# EAGLE board Control-print (EAGLE 5.12), part 1 of 2
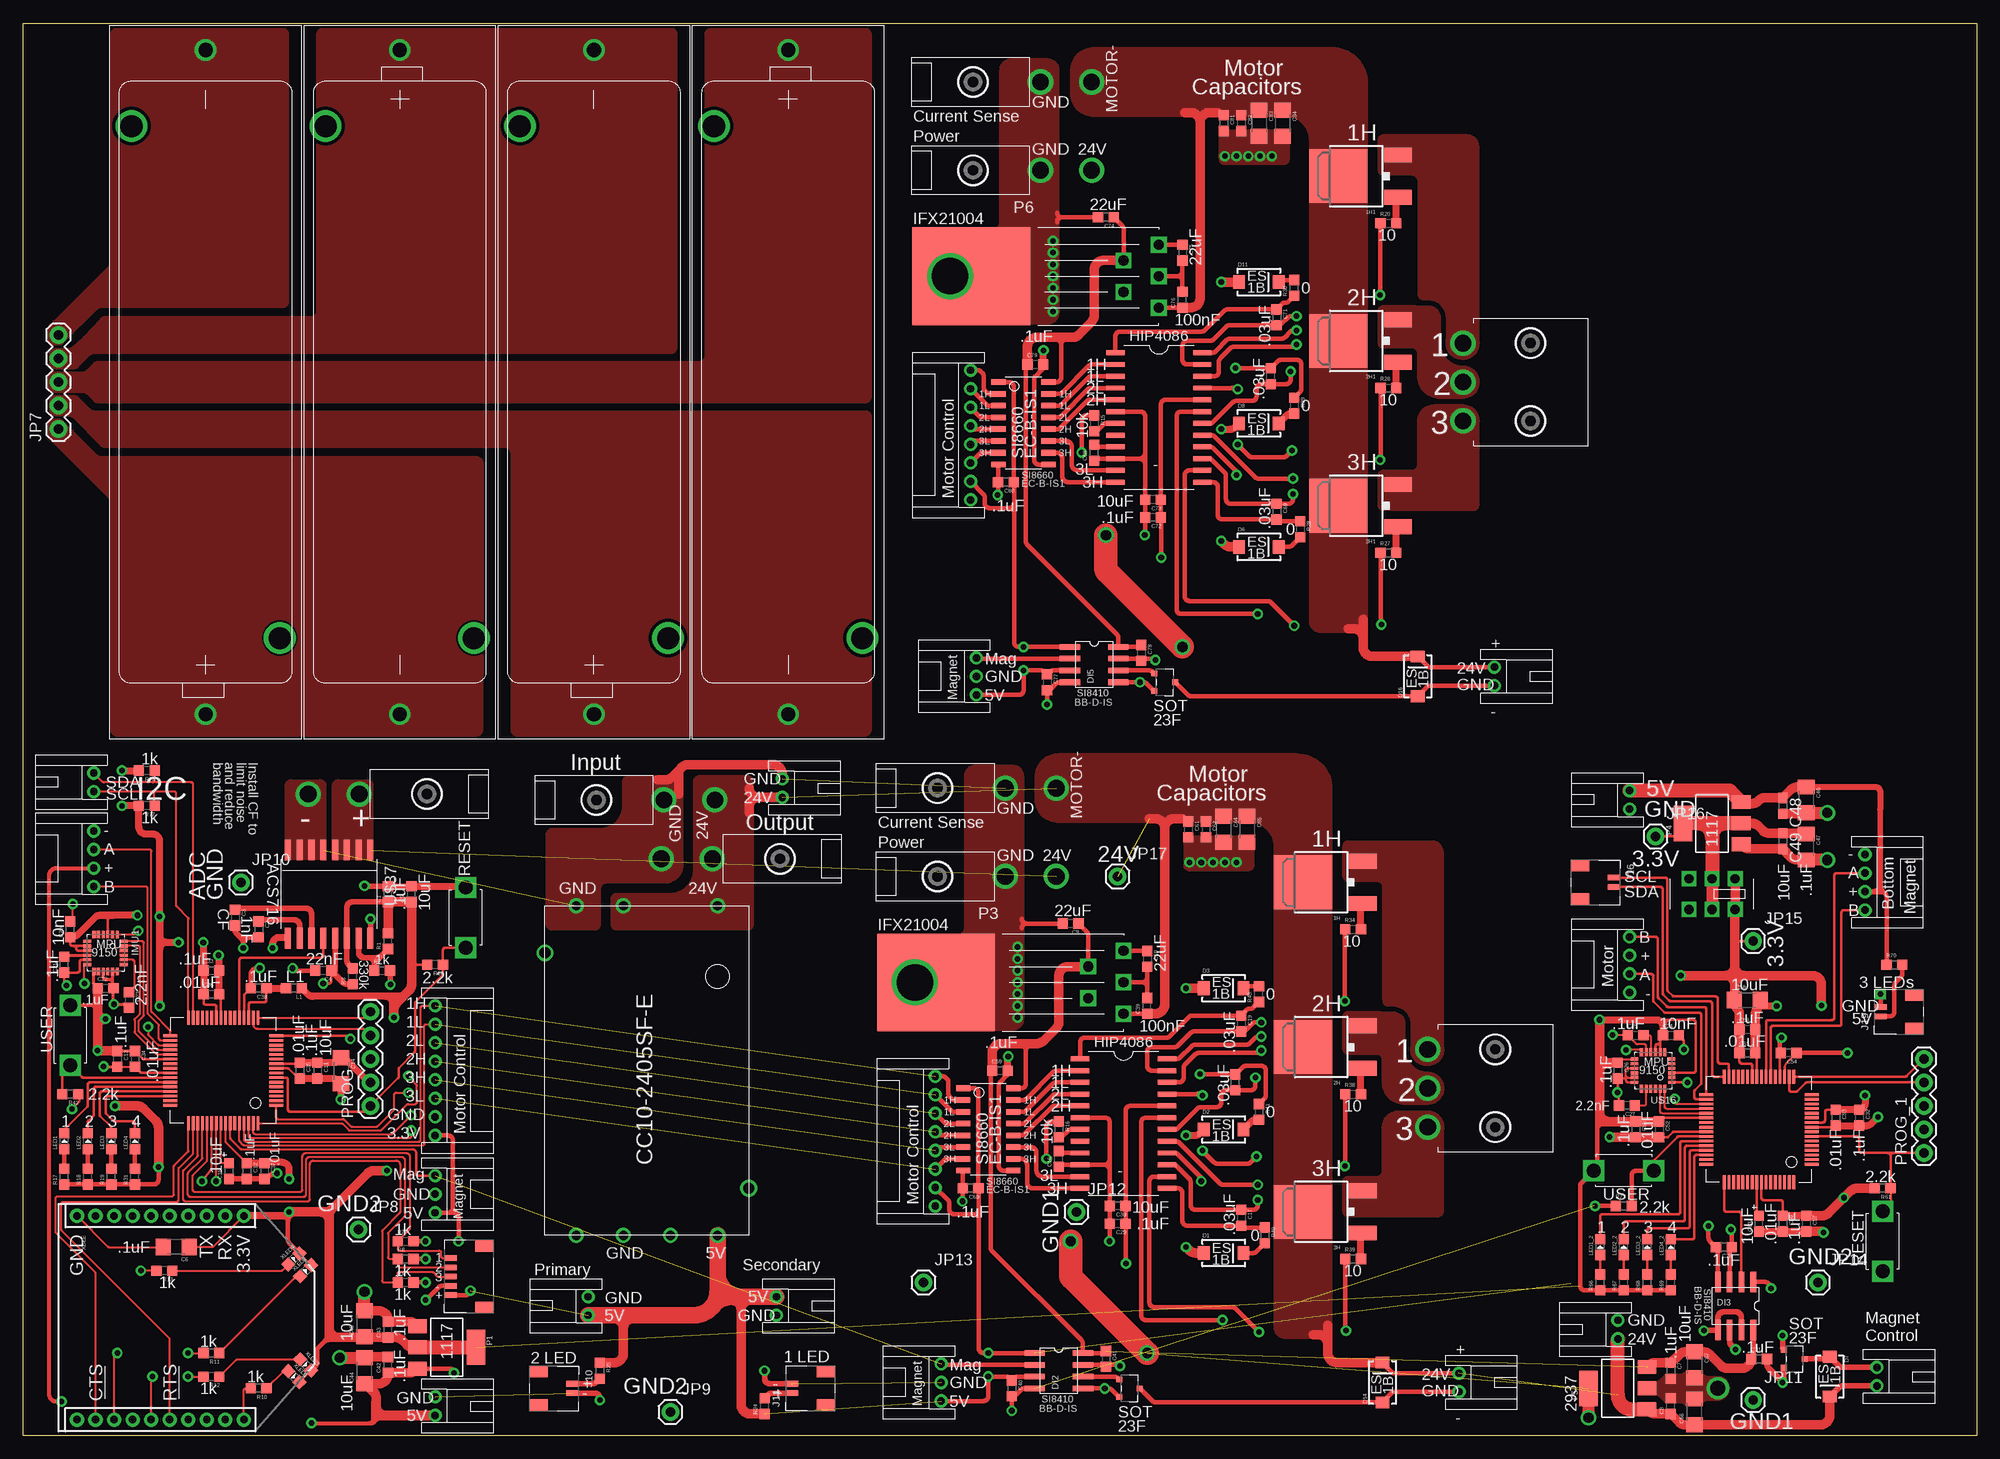
[diagram p0: board, top side]
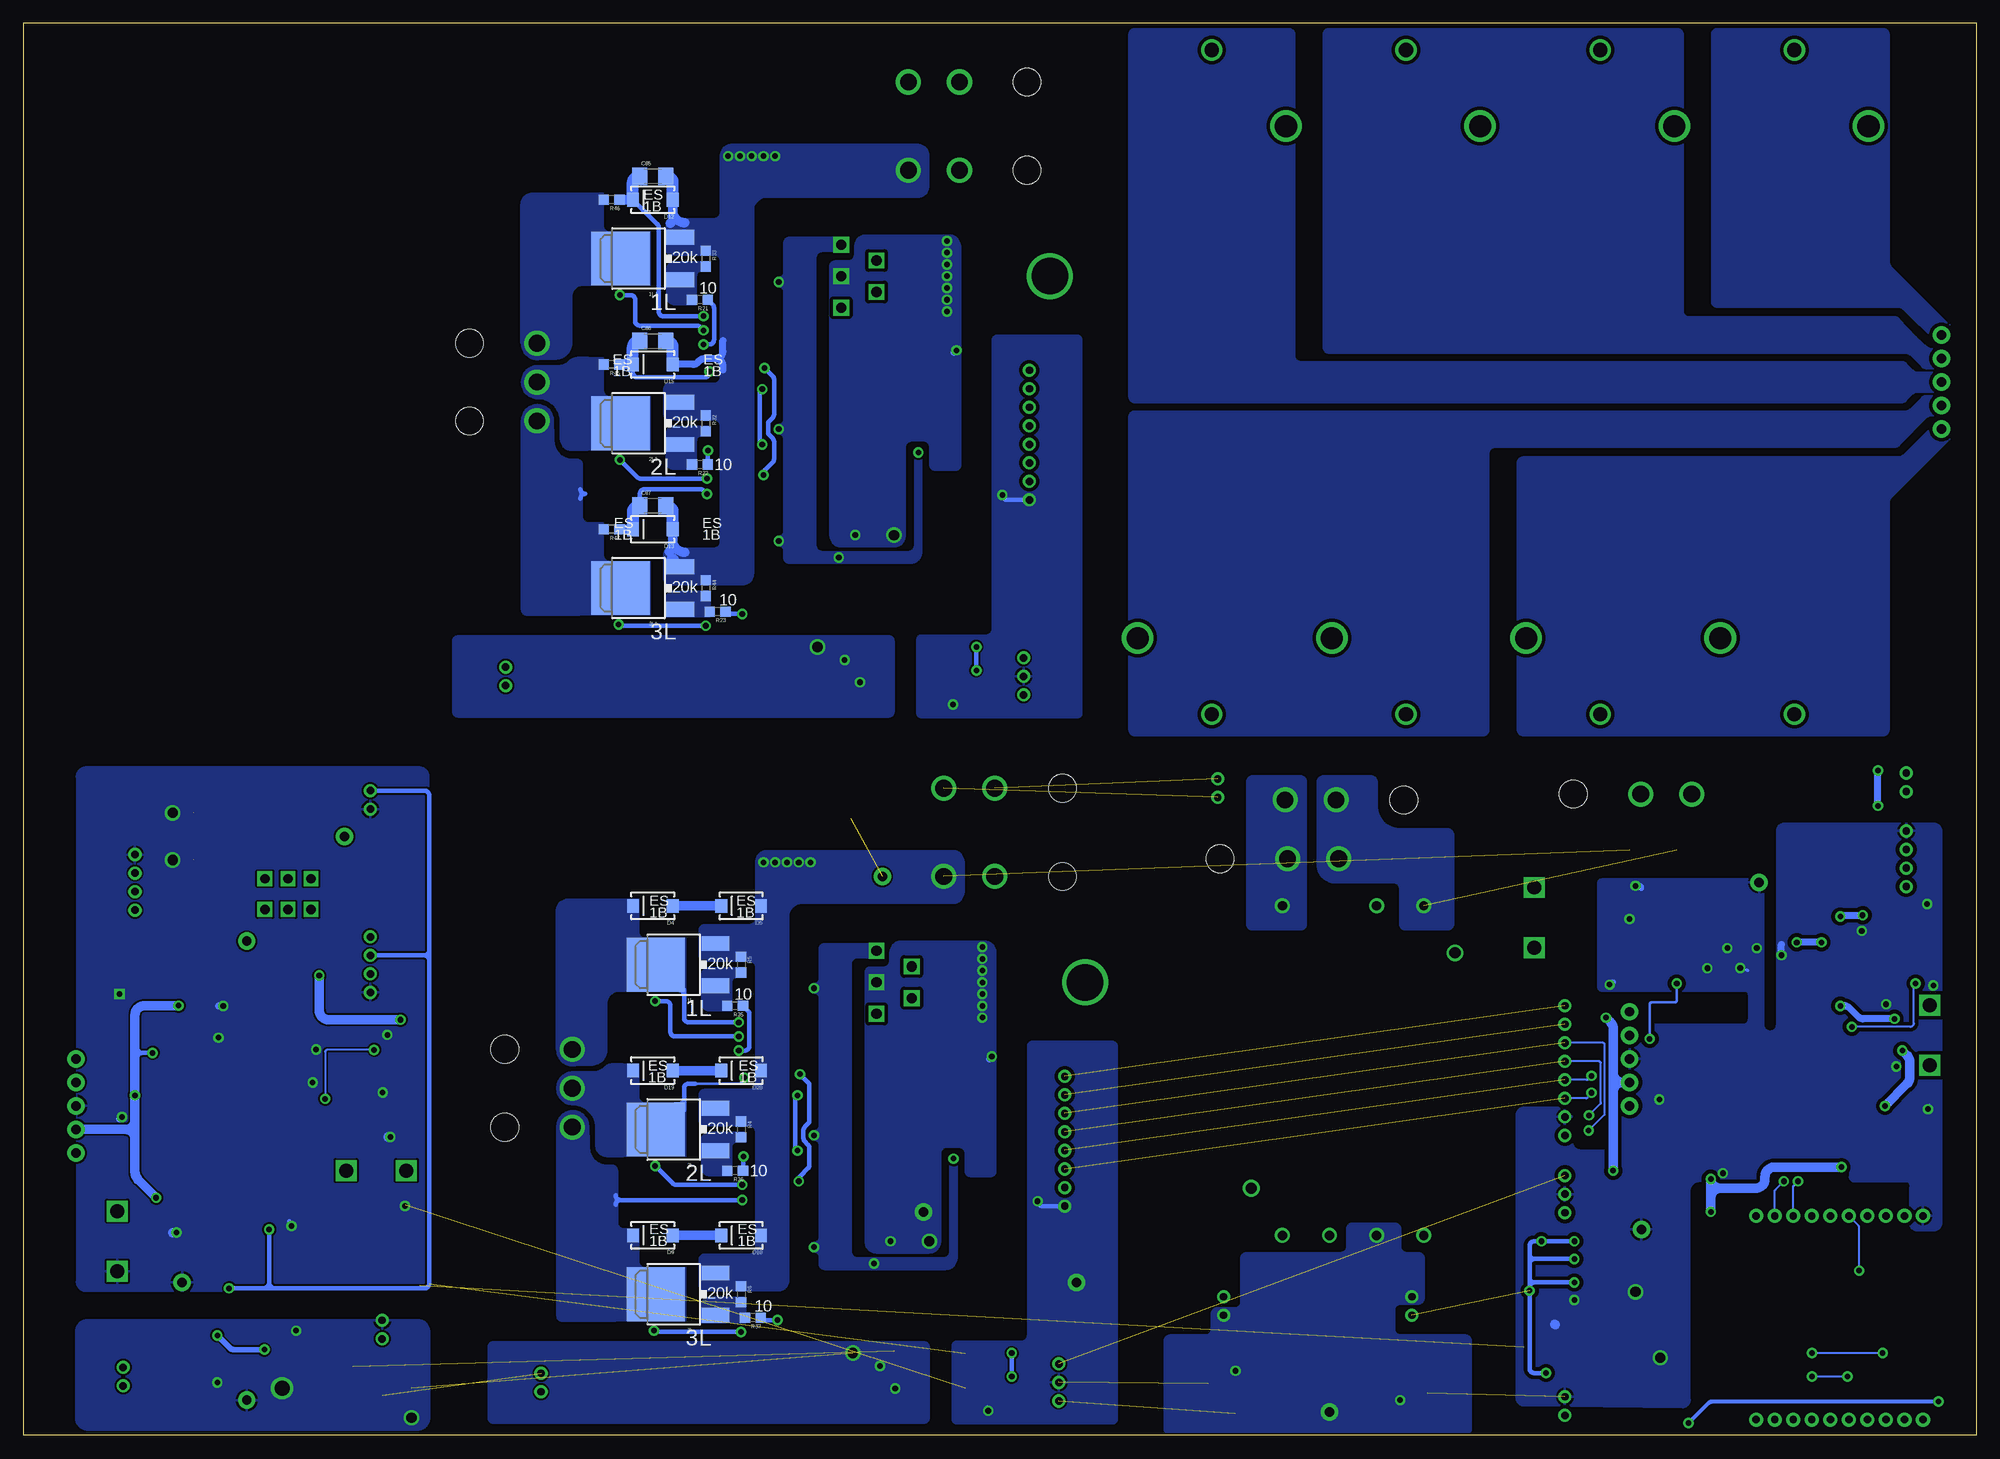
[diagram p1: board, bottom side, seen from below]

Size 210.82 x 152.4 mm. Coordinates in mm from the lower left corner, seen from the top.
Outline: 0,0 210.82,0 210.82,152.4 0,152.4 0,0
Copper layers (1*16): Top 0.035mm / dielectric 1.5mm / Bottom 0.035mm
Design rules "Andrew *": minimum track width 8mil, minimum drill 20mil, track to track 8mil, track to pad 8mil, pad to pad 2mil, via to via 8mil, smd to smd 8mil, copper to edge 10mil, drill to drill 8mil, minimum pad ring 12mil, minimum via ring 10mil, stop-mask expansion 4mil, vias tented up to drill 25mil, thermal gap 10mil

## Footprints (pad centres in the part's own frame; a part is rotated, then mirrored left to right if it is on the bottom)
DPAK = smd 5.791 x 6.274: D 0,1.587 | smd 1.6 x 3: G -2.286,-4.851; S 2.286,-4.851
1043P = drill 1.524 round: + -35.839,0; - 35.839,0 | drill 2.388 round: P$1 -27.622,-8.001; P$2 27.622,8.001
0603 = smd 1.1 x 1.1: 1 -0.85,0; 2 0.85,0
1206 = smd 1.6 x 1.8: 1 -1.4,0; 2 1.4,0
0603-POL = smd 1.1 x 1: + 0.85,0; - -0.85,0
C0603 = smd 1.1 x 1: 1 -0.85,0; 2 0.85,0
SMA-DIODE@1 = smd 1.27 x 1.47: A -2.15,0; C 2.15,0
SOIC16-N = smd 0.6 x 1.55: 1 -4.445,-2.7; 2 -3.175,-2.7; 3 -1.905,-2.7; 4 -0.635,-2.7; 5 0.635,-2.7; 6 1.905,-2.7; 7 3.175,-2.7; 8 4.445,-2.7; 9 4.445,2.7; 10 3.175,2.7; 11 1.905,2.7; 12 0.635,2.7; 13 -0.635,2.7; 14 -1.905,2.7; 15 -3.175,2.7; 16 -4.445,2.7
SOIC8-N = smd 2.2 x 0.6: 1 -2.6,1.905; 2 -2.6,0.635; 3 -2.6,-0.635; 4 -2.6,-1.905; 5 2.6,-1.905; 6 2.6,-0.635; 7 2.6,0.635; 8 2.6,1.905
LGA24_4X4 = smd 0.8 x 0.35: 1 -2,1.25; 2 -2,0.75; 3 -2,0.25; 4 -2,-0.25; 5 -2,-0.75; 6 -2,-1.25; 13 2,-1.25; 14 2,-0.75; 15 2,-0.25; 16 2,0.25; 17 2,0.75; 18 2,1.25 | smd 0.35 x 0.85: 7 -1.25,-1.975; 8 -0.75,-1.975; 9 -0.25,-1.975; 10 0.25,-1.975; 11 0.75,-1.975; 12 1.25,-1.975; 19 1.25,1.975; 20 0.75,1.975; 21 0.25,1.975; 22 -0.25,1.975; 23 -0.75,1.975; 24 -1.25,1.975
JST-2-PH-TH = drill 0.8 round: 1 -1,-6.35; 2 1,-6.35
JST-4-PH-TH = drill 0.8 round: 1 -3,-6.35; 2 -1,-6.35; 3 1,-6.35; 4 3,-6.35
JST-8-PH-TH = drill 0.8 round: 1 -7,-6.35; 2 -5,-6.35; 3 -3,-6.35; 4 -1,-6.35; 5 1,-6.35; 6 3,-6.35; 7 5,-6.35; 8 7,-6.35
JST-3-PH-TH = drill 0.8 round: 1 -2,-6.35; 2 0,-6.35; 3 2,-6.35
JST-SH-5 = smd 0.6 x 1.35: 1 2,4.675; 2 1,4.675; 3 0,4.675; 4 -1,4.675; 5 -2,4.675 | smd 1.2 x 2: P$6 -3.3,1; P$7 3.3,1
JST-SH-2 = smd 0.6 x 1.35: 1 0.5,4.675; 2 -0.5,4.675 | smd 1.2 x 2: P$6 -1.8,1; P$7 1.8,1
MOLEX-2-MINIFITJR-RA = drill 1.803 round: 1 0,13.894; 2 0,19.406 | hole 3: 0,6.604
MOLEX-3-MINIFITJR-RA = drill 1.803 round: 1 4.191,13.538; 2 0,13.538; 3 -4.191,13.538 | hole 3: -4.204,6.248; 4.204,6.248
1X05 = drill 1.016 pad 1.88 round: 1 0,0; 2 2.54,0; 3 5.08,0; 4 7.62,0; 5 10.16,0
1X01 = drill 1.016 pad 1.88 round: 1 0,0
0603-DIODE = smd 1.1 x 1.1: AN -0.85,0; CAT 0.85,0
SOT23F = smd 0.6 x 0.65: D 0,1.125; G -0.95,-1.125; S 0.95,-1.125
TACTILE_SWITCH = drill 1.5 square: 1 -3.25,0; 2 3.25,0
SOT223 = smd 1.499 x 2.007: 1 -2.261,-3.15; 2 0.025,-3.15; 3 2.311,-3.15 | smd 3.81 x 2.007: 4 0,3.15
CC10-2405SF-E = drill 1 round: 1 -17.78,7.62; 2 -17.78,-2.54; 3 -17.78,-7.62; 4 17.78,-7.62; 5 17.78,-2.54; 6 17.78,2.54; 7 17.78,7.62 | drill 1.2 round: P$1 12.7,11; P$2 -12.7,-11
TO220-5 = drill 1.1 square: 1 3.81,-3.404; 2 0,-1.702; 3 3.81,0; 4 0,1.702; 5 3.81,3.404 | smd 12.7 x 10.541: PAD -16.434,0 | drill 3.937 round: PAD2 -18.72,0
TQFP64_10X10 = smd 1.5 x 0.3: 1 -5.7,3.75; 2 -5.7,3.25; 3 -5.7,2.75; 4 -5.7,2.25; 5 -5.7,1.75; 6 -5.7,1.25; 7 -5.7,0.75; 8 -5.7,0.25; 9 -5.7,-0.25; 10 -5.7,-0.75; 11 -5.7,-1.25; 12 -5.7,-1.75; 13 -5.7,-2.25; 14 -5.7,-2.75; 15 -5.7,-3.25; 16 -5.7,-3.75; 33 5.7,-3.75; 34 5.7,-3.25; 35 5.7,-2.75; 36 5.7,-2.25; 37 5.7,-1.75; 38 5.7,-1.25; 39 5.7,-0.75; 40 5.7,-0.25; 41 5.7,0.25; 42 5.7,0.75; 43 5.7,1.25; 44 5.7,1.75; 45 5.7,2.25; 46 5.7,2.75; 47 5.7,3.25; 48 5.7,3.75 | smd 0.3 x 1.5: 17 -3.75,-5.7; 18 -3.25,-5.7; 19 -2.75,-5.7; 20 -2.25,-5.7; 21 -1.75,-5.7; 22 -1.25,-5.7; 23 -0.75,-5.7; 24 -0.25,-5.7; 25 0.25,-5.7; 26 0.75,-5.7; 27 1.25,-5.7; 28 1.75,-5.7; 29 2.25,-5.7; 30 2.75,-5.7; 31 3.25,-5.7; 32 3.75,-5.7; 49 3.75,5.7; 50 3.25,5.7; 51 2.75,5.7; 52 2.25,5.7; 53 1.75,5.7; 54 1.25,5.7; 55 0.75,5.7; 56 0.25,5.7; 57 -0.25,5.7; 58 -0.75,5.7; 59 -1.25,5.7; 60 -1.75,5.7; 61 -2.25,5.7; 62 -2.75,5.7; 63 -3.25,5.7; 64 -3.75,5.7
SOIC24-W = smd 0.533 x 1.981: 1 -6.985,-4.686; 2 -5.715,-4.686; 3 -4.445,-4.686; 4 -3.175,-4.686; 5 -1.905,-4.686; 6 -0.635,-4.686; 7 0.635,-4.686; 8 1.905,-4.686; 9 3.175,-4.686; 10 4.445,-4.686; 11 5.715,-4.686; 12 6.985,-4.686; 13 6.985,4.686; 14 5.715,4.686; 15 4.445,4.686; 16 3.175,4.686; 17 1.905,4.686; 18 0.635,4.686; 19 -0.635,4.686; 20 -1.905,4.686; 21 -3.175,4.686; 22 -4.445,4.686; 23 -5.715,4.686; 24 -6.985,4.686
SOIC16-W = smd 0.65 x 2.25: 1 -4.445,-4.75; 2 -3.175,-4.75; 3 -1.905,-4.75; 4 -0.635,-4.75; 5 0.635,-4.75; 6 1.905,-4.75; 7 3.175,-4.75; 8 4.445,-4.75; 9 4.445,4.75; 10 3.175,4.75; 11 1.905,4.75; 12 0.635,4.75; 13 -0.635,4.75; 14 -1.905,4.75; 15 -3.175,4.75; 16 -4.445,4.75
SLIDE_SWITCH = drill 1 square: 1 -2.489,1.651; 2 0,1.651; 3 2.489,1.651; 4 2.489,-1.651; 5 0,-1.651; 6 -2.489,-1.651
XBEE-SILK = drill 0.8 pad 1.524 round: 1 -11,20; 2 -11,18; 3 -11,16; 4 -11,14; 5 -11,12; 6 -11,10; 7 -11,8; 8 -11,6; 9 -11,4; 10 -11,2; 11 11,2; 12 11,4; 13 11,6; 14 11,8; 15 11,10; 16 11,12; 17 11,14; 18 11,16; 19 11,18; 20 11,20

## Placement (x,y rotation side)
1H  IRLR024  [DPAK]  139.7,59.69 90 top
1H1  IRLR024  [DPAK]  143.51,135.89 90 top
1L  IRLR024  [DPAK]  140.97,50.8 90 bottom
1L1  IRLR024  [DPAK]  144.78,127 90 bottom
2H  IRLR024  [DPAK]  139.7,41.91 90 top
2H1  IRLR024  [DPAK]  143.51,118.11 90 top
2L  IRLR024  [DPAK]  140.97,33.02 90 bottom
2L1  IRLR024  [DPAK]  144.78,109.22 90 bottom
3H  IRLR024  [DPAK]  139.7,24.13 90 top
3H1  IRLR024  [DPAK]  143.51,100.33 90 top
3L  IRLR024  [DPAK]  140.97,15.24 90 bottom
3L1  IRLR024  [DPAK]  144.78,91.44 90 bottom
BAT1  BATTERY-18650HOLDER  [1043P]  19.68,113.67 90 top
BAT2  BATTERY-18650HOLDER  [1043P]  40.64,113.67 270 top
BAT3  BATTERY-18650HOLDER  [1043P]  61.59,113.67 90 top
BAT4  BATTERY-18650HOLDER  [1043P]  82.55,113.67 270 top
C1  .1uF  [0603]  39.37,58.42 90 top
C2  1nF  [0603]  25.4,54.61 270 top
C3  DNI  [0603]  22.86,55.88 270 top
C4  22nF  [0603]  32.38,50.16 180 top
C5  10uF  [0603]  41.91,58.42 90 top
C6  .1uF  [1206]  16.51,20.32 180 top
C7  .1uF  [0603]  177.8,6.99 270 top
C8  .1uF  [0603]  177.8,3.17 90 top
C9  22uF  [0603]  113.03,55.24 180 top
C10  22uF  [0603]  121.28,51.44 270 top
C11  .1uF  [0603]  31.75,39.37 270 top
C12  .1uF  [0603]  24.13,28.52 270 top
C13  .1uF  [0603]  10.16,40.64 270 top
C14  10uF  [1206]  34.29,39.37 270 top
C15  10uF  [0603-POL]  22.23,28.52 90 top
C16  DNI  [0603]  111.76,29.84 90 top
C17  .03uF  [0603]  131.44,23.5 270 top
C18  .03uF  [0603]  130.81,38.1 90 top
C19  .03uF  [0603]  131.44,44.45 270 top
C20  10nF  [0603]  5.08,54.61 90 top
C21  .1uF  [0603]  4.45,50.8 90 top
C22  .1uF  [0603]  8.89,48.26 0 top
C23  2.2nF  [0603]  11.43,46.99 270 top
C24  10nF  [0603]  177.8,43.18 0 top
C25  .1uF  [0603]  173.99,43.18 0 top
C26  .1uF  [0603]  172.09,39.37 270 top
C27  2.2nF  [0603]  173.05,35.61 180 top
C28  .1uF  [0603]  183.51,20.32 180 top
C29  .1uF  [0603]  118.11,22.86 180 top
C30  10uF  [0603]  118.11,24.77 180 top
C31  .1uF  [0603]  187.32,8.26 0 top
C32  .1uF  [0603]  198.12,34.29 270 top
C33  .1uF  [0603]  20.32,50.16 0 top
C34  .01uF  [0603]  12.06,40.64 270 top
C35  .01uF  [0603]  29.84,39.37 270 top
C36  .01uF  [0603]  20.32,47.62 0 top
C37  .01uF  [0603]  26.04,28.52 270 top
C38  .1uF  [0603]  25.4,48.26 180 top
C39  100nF  [0603]  121.28,46.35 90 top
C40  .1uF  [0603]  106.68,5.08 270 top
C41  .1uF  [0603]  116.84,8.26 270 top
C42  0.1uF  [0603]  39.37,7.62 90 top
C43  0.1uF  [0603]  39.37,11.43 90 top
C44  10uF  [1206]  36.83,6.99 90 top
C45  10uF  [1206]  36.83,12.06 90 top
C46  0.1uF  [1206]  192.41,68.58 270 top
C47  0.1uF  [1206]  192.41,63.5 270 top
C48  10uF  [C0603]  189.87,67.94 270 top
C49  10uF  [C0603]  189.87,64.14 270 top
C50  .01uF  [0603]  189.87,22.86 270 top
C51  .01uF  [0603]  186.06,41.27 0 top
C52  .01uF  [0603]  176.53,33.02 270 top
C53  .01uF  [0603]  195.58,34.29 270 top
C54  .1uF  [0603]  190.5,41.27 180 top
C55  .1uF  [0603]  173.99,33.02 270 top
C56  .1uF  [0603]  186.06,43.81 0 top
C57  .1uF  [0603]  192.41,22.86 270 top
C58  10uF  [1206]  186.06,46.99 0 top
C59  .1uF  [0603]  105.41,39.37 0 top
C60  .1uF  [0603]  102.23,26.67 180 top
C61  [0603]  125.73,65.41 270 top
C62  [0603]  127.64,65.41 270 top
C63  10uF  [0603-POL]  187.32,22.86 90 top
C64  [1206]  129.54,65.41 270 top
C65  [1206]  132.08,65.41 270 top
C66  10uF  [1206]  180.34,2.54 90 top
C67  10uF  [1206]  180.34,7.62 270 top
C68  DNI  [0603]  115.57,106.05 90 top
C69  .03uF  [0603]  135.25,99.69 270 top
C70  .03uF  [0603]  134.62,114.3 90 top
C71  .03uF  [0603]  135.25,120.65 270 top
C72  .1uF  [0603]  121.92,99.06 180 top
C73  10uF  [0603]  121.92,100.97 180 top
C74  22uF  [0603]  116.84,131.44 180 top
C75  22uF  [0603]  125.09,127.64 270 top
C76  100nF  [0603]  125.09,122.56 90 top
C77  .1uF  [0603]  110.49,81.28 270 top
C78  .1uF  [0603]  120.65,84.45 270 top
C79  .1uF  [0603]  109.22,115.57 0 top
C80  .1uF  [0603]  106.05,102.87 180 top
C81  [0603]  129.54,141.6 270 top
C82  [0603]  131.44,141.6 270 top
C83  [1206]  133.35,141.6 270 top
C84  [1206]  135.89,141.6 270 top
C85  [1206]  142.88,135.89 0 bottom
C86  [1206]  142.88,118.11 0 bottom
C87  [1206]  142.88,100.33 0 bottom
D1  ES1B  [SMA-DIODE@1]  129.54,19.68 0 top
D2  ES1B  [SMA-DIODE@1]  129.54,33.02 0 top
D3  ES1B  [SMA-DIODE@1]  129.54,48.26 0 top
D4  ES1B  [SMA-DIODE@1]  142.88,57.15 180 bottom
D5  ES1B  [SMA-DIODE@1]  133.35,57.15 180 bottom
D6  ES1B  [SMA-DIODE@1]  133.35,95.89 0 top
D7  ES1B  [SMA-DIODE@1]  194.94,6.35 270 top
D8  ES1B  [SMA-DIODE@1]  133.35,109.22 0 top
D9  ES1B  [SMA-DIODE@1]  142.88,21.59 180 bottom
D10  ES1B  [SMA-DIODE@1]  133.35,21.59 180 bottom
D11  ES1B  [SMA-DIODE@1]  133.35,124.46 0 top
D12  ES1B  [SMA-DIODE@1]  142.88,133.35 180 bottom
D13  ES1B  [SMA-DIODE@1]  142.88,97.79 180 bottom
D14  ES1B  [SMA-DIODE@1]  146.69,5.71 90 top
D15  ES1B  [SMA-DIODE@1]  142.88,115.57 180 bottom
D16  ES1B  [SMA-DIODE@1]  150.5,81.92 90 top
D19  ES1B  [SMA-DIODE@1]  142.88,39.37 180 bottom
D20  ES1B  [SMA-DIODE@1]  133.35,39.37 180 bottom
DI1  DIGITAL-ISOLATOR-6CH  [SOIC16-N]  104.14,33.02 270 top
DI2  DIGITAL-ISOLATOR-1CHSOIC8-N  [SOIC8-N]  111.76,6.99 0 top
DI3  DIGITAL-ISOLATOR-1CHSOIC8-N  [SOIC8-N]  184.78,13.97 270 top
DI4  DIGITAL-ISOLATOR-6CH  [SOIC16-N]  107.95,109.22 270 top
DI5  DIGITAL-ISOLATOR-1CHSOIC8-N  [SOIC8-N]  115.57,83.19 0 top
IMU1  MPU-9150  [LGA24_4X4]  8.89,52.07 270 top
J1  [JST-2-PH-TH]  1.27,70.48 90 top
J2  [JST-4-PH-TH]  1.27,62.23 90 top
J3  MO8JST-SH-TH  [JST-8-PH-TH]  50.8,39.37 270 top
J4  [JST-3-PH-TH]  50.8,26.04 270 top
J5  [JST-SH-5]  50.8,17.14 90 top
J6  [JST-2-PH-TH]  50.8,3.17 270 top
J7  [JST-2-PH-TH]  88.27,69.85 270 top
J8  [JST-2-PH-TH]  54.61,13.97 90 top
J9  [JST-2-PH-TH]  87.63,13.97 270 top
J10  [JST-SH-2]  54.61,5.08 270 top
J11  [JST-SH-2]  87.63,5.08 90 top
J12  MO8JST-SH-TH  [JST-8-PH-TH]  92.08,31.75 90 top
J13  [JST-3-PH-TH]  92.71,5.71 90 top
J14  [JST-2-PH-TH]  161.29,5.71 270 top
J15  [JST-2-PH-TH]  167,68.58 90 top
J16  [JST-SH-2]  167,59.69 270 top
J17  [JST-4-PH-TH]  205.1,59.69 270 top
J18  [JST-4-PH-TH]  167,50.8 90 top
J19  [JST-SH-2]  205.1,45.72 90 top
J20  [JST-2-PH-TH]  165.74,11.43 90 top
J21  [JST-2-PH-TH]  206.38,6.35 270 top
J22  [JST-2-PH-TH]  165.1,81.92 270 top
J23  [JST-3-PH-TH]  96.52,81.92 90 top
J24  MO8JST-SH-TH  [JST-8-PH-TH]  95.89,107.95 90 top
JP1  [MOLEX-2-MINIFITJR-RA]  50.16,69.22 90 top
JP2  [MOLEX-2-MINIFITJR-RA]  55.24,68.58 270 top
JP3  [MOLEX-2-MINIFITJR-RA]  88.27,62.23 90 top
JP4  [MOLEX-2-MINIFITJR-RA]  92.08,69.85 270 top
JP5  [MOLEX-2-MINIFITJR-RA]  92.08,60.33 270 top
JP6  [MOLEX-3-MINIFITJR-RA]  165.1,37.47 90 top
JP7  [1X05]  3.81,108.58 90 top
JP8  M01PTH  [1X01]  36.2,22.23 0 top
JP9  M01PTH  [1X01]  69.85,2.54 0 top
JP10  M01PTH  [1X01]  23.5,59.69 0 top
JP11  M01PTH  [1X01]  186.69,3.81 0 top
JP12  M01PTH  [1X01]  113.67,24.13 0 top
JP13  M01PTH  [1X01]  97.16,16.51 0 top
JP14  M01PTH  [1X01]  193.68,16.51 0 top
JP15  M01PTH  [1X01]  186.69,53.34 0 top
JP16  M01PTH  [1X01]  176.15,64.64 0 top
JP17  M01PTH  [1X01]  118.11,60.33 0 top
JP18  [MOLEX-3-MINIFITJR-RA]  168.91,113.67 90 top
JP19  [MOLEX-2-MINIFITJR-RA]  95.89,146.05 270 top
JP20  [MOLEX-2-MINIFITJR-RA]  95.89,136.53 270 top
L1  DNI  [0603]  29.21,48.26 180 top
LED1  [0603-DIODE]  4.45,31.75 90 top
LED1_2  [0603-DIODE]  170.18,20.32 90 top
LED2  [0603-DIODE]  6.99,31.75 90 top
LED2_2  [0603-DIODE]  172.72,20.32 90 top
LED3  [0603-DIODE]  9.53,31.75 90 top
LED3_2  [0603-DIODE]  175.26,20.32 90 top
LED4  [0603-DIODE]  12.06,31.75 90 top
LED4_2  [0603-DIODE]  177.8,20.32 90 top
M1  N-MOSSOT23F  [SOT23F]  119.38,5.08 270 top
M2  N-MOSSOT23F  [SOT23F]  191.13,8.26 270 top
M3  N-MOSSOT23F  [SOT23F]  123.19,81.28 270 top
MAINRESET  TACTILE_SWITCH  [TACTILE_SWITCH]  47.75,55.88 90 top
MAINUSER  TACTILE_SWITCH  [TACTILE_SWITCH]  5.08,43.18 270 top
P1  LINEAR-REGREG1117  [SOT223]  45.72,9.53 270 top
P2  DC-DC-CONVERTER  [CC10-2405SF-E]  67.31,39.37 270 top
P3  IFX21004TNV51  [TO220-5]  114.94,48.9 0 top
P4  LINEAR-REGREG1117  [SOT223]  182.25,66.04 90 top
P5  LINEAR-REGLM2937  [SOT223]  172.09,5.08 90 top
P6  IFX21004TNV51  [TO220-5]  118.75,125.09 0 top
PIC1  DSPIC33EP512MC806  [TQFP64_10X10]  21.59,39.37 180 top
PIC2  DSPIC33EP512MC806  [TQFP64_10X10]  187.32,33.02 180 top
PROG  [1X05]  37.47,35.56 90 top
PROG_1  [1X05]  205.1,30.48 90 top
R1  2k  [0603]  39.37,53.34 90 top
R2  1k  [0603]  38.73,50.16 0 top
R3  330k  [0603]  35.56,49.53 90 top
R4  20k  [0603]  133.35,33.02 270 bottom
R5  20k  [0603]  133.35,50.8 270 bottom
R6  20k  [0603]  133.35,15.24 270 bottom
R7  1k  [0603]  41.27,20.95 0 top
R8  1k  [0603]  41.27,19.05 0 top
R9  1k  [0603]  41.27,16.51 0 top
R10  1k  [0603]  25.4,5.08 180 top
R11  1k  [0603]  20.32,8.89 180 top
R12  1k  [0603]  20.32,6.35 180 top
R13  1k  [0603]  15.24,17.78 180 top
R14  2.2k  [0603]  44.45,50.8 180 top
R15  10k  [0603]  115.57,109.22 270 top
R16  10k  [0603]  111.76,33.02 270 top
R17  1k  [0603]  4.45,27.94 90 top
R18  1k  [0603]  6.99,27.94 90 top
R19  1k  [0603]  9.53,27.94 90 top
R20  10ohm  [0603]  147.32,130.81 0 top
R21  10ohm  [0603]  137.79,122.56 180 bottom
R22  10ohm  [0603]  137.79,104.78 180 bottom
R23  10ohm  [0603]  135.89,88.9 180 bottom
R24  [0603]  80.01,3.17 90 top
R25  [0603]  62.23,6.99 270 top
R26  10ohm  [0603]  147.32,113.03 0 top
R27  10ohm  [0603]  147.32,95.25 0 top
R28  0ohm  [0603]  137.79,97.79 270 top
R29  0ohm  [0603]  137.16,111.12 270 top
R30  0ohm  [0603]  137.16,123.83 90 top
R31  1k  [0603]  12.06,27.94 90 top
R32  20k  [0603]  137.16,109.22 270 bottom
R33  20k  [0603]  137.16,127 270 bottom
R34  10ohm  [0603]  143.51,54.61 0 top
R35  10ohm  [0603]  133.99,46.35 180 bottom
R36  10ohm  [0603]  133.99,28.57 180 bottom
R37  10ohm  [0603]  132.08,12.7 180 bottom
R38  10ohm  [0603]  143.51,36.83 0 top
R39  10ohm  [0603]  143.51,19.05 0 top
R40  0ohm  [0603]  133.99,21.59 270 top
R41  0ohm  [0603]  133.35,34.92 270 top
R42  2.2k  [0603]  5.08,36.83 180 top
R43  0ohm  [0603]  133.35,47.62 90 top
R44  20k  [0603]  137.16,91.44 270 bottom
R45  [0603]  147.32,115.57 180 bottom
R46  [0603]  147.32,133.35 180 bottom
R47  [0603]  147.32,97.79 180 bottom
R61  2.2k  [0603]  200.66,26.67 180 top
R66  1k  [0603]  170.18,16.51 90 top
R67  1k  [0603]  172.72,16.51 90 top
R68  1k  [0603]  175.26,16.51 90 top
R69  1k  [0603]  177.8,16.51 90 top
R70  330  [0603]  201.93,50.8 0 top
R73  2.2k  [0603]  172.72,24.77 0 top
R77  1k  [0603]  13.34,67.94 180 top
R78  1k  [0603]  13.34,71.75 180 top
RESET_2  TACTILE_SWITCH  [TACTILE_SWITCH]  200.66,20.95 270 top
U$1  HIP4086  [SOIC24-W]  122.56,109.86 270 top
U$16  MPU-9150  [LGA24_4X4]  175.9,39.37 180 top
U$22  HIP4086  [SOIC24-W]  118.75,33.66 270 top
U$37  ACS716  [SOIC16-W]  33.02,58.42 180 top
U$73  SLIDE_SWTHROUGHHOLE  [SLIDE_SWITCH]  182.25,58.42 180 top
USER_2  TACTILE_SWITCH  [TACTILE_SWITCH]  172.72,28.57 0 top
XBEE  XBEE-1B2  [XBEE-SILK]  3.81,12.7 270 top
XLED1  [0603-DIODE]  29.21,6.35 315 top
XLED2  [0603-DIODE]  30.48,17.78 45 top
XLED3  [0603-DIODE]  30.48,7.62 315 top
XLED4  [0603-DIODE]  29.21,19.05 45 top

## Library data of the parts
1H 1H1 1L 1L1 2H 2H1 2L 2L1 3H 3H1 3L 3L1 BAT1-BAT4 C1-C47 C50-C87 D1-D16 D19 D20 DI1-DI5 IMU1 J1-J24 JP1-JP20 L1 LED1 LED1_2 LED2 LED2_2 LED3 LED3_2 LED4 LED4_2 M1-M3 MAINRESET MAINUSER P1-P6 PIC1 PIC2 PROG PROG_1 R1-R47 R61 R66-R70 R73 R77 R78 RESET_2 U$1 U$16 U$22 U$37 USER_2 XBEE XLED1-XLED4 = Gibbot v4
C48 C49 U$73 = Gibbot

## Nets
1: BAT1.- JP7.5
1HO: 1H.G R34.2
1HO1: 1H1.G R20.2
1HS: 1H.S 1L.D C19.2 D4.C JP6.1 U$22.23
1HS1: 1H1.S 1L1.D JP18.1 R46.2
1HSO: C71.2 C85.1 D12.C R46.1 U$1.23
1LO: 1L.G R5.2 R35.2
1LO1: 1L1.G R21.2 R33.2
2: BAT2.+ BAT3.- JP7.4
2HO: 2H.G R38.2
2HO1: 2H1.G R26.2
2HS: 2H.S 2L.D C18.1 D19.C JP6.2 U$22.18
2HS1: 2H1.S 2L1.D JP18.2 R45.2
2HSO: C70.1 C86.1 D15.C R45.1 U$1.18
2LO: 2L.G R4.2 R36.2
2LO1: 2L1.G R22.2 R32.2
3: BAT4.+ JP7.3
3.3V: C1.1 C5.1 C6.1 C11.1 C12.1 C13.1 C14.1 C20.1 C22.1 C24.1 C26.1 C32.1 C33.1 C34.1 C35.1 C36.1 C37.1 C43.1 C45.1 C50.1 C51.1 C52.1 C53.1 C54.1 C55.1 C56.1 C57.1 C58.1 IMU1.3 IMU1.8 IMU1.9 IMU1.13 JP15.1 L1.1 MAINUSER.1 P1.2 P1.4 PIC1.10 PIC1.26 PIC1.38 PIC1.57 PIC2.10 PIC2.19 PIC2.26 PIC2.38 PIC2.57 PROG.2 PROG_1.2 R1.2 R3.2 R14.2 R17.1 R18.1 R19.1 R31.1 R61.2 R66.1 R67.1 R68.1 R69.1 R77.2 R78.2 U$16.3 U$16.8 U$16.9 U$16.13 U$37.14 U$73.1 U$73.6 USER_2.1 XBEE.1 XLED1.CAT XLED2.CAT XLED3.CAT XLED4.CAT
3HO: 3H.G R39.2
3HO1: 3H1.G R27.2
3HS: 3H.S 3L.D C17.1 D9.C JP6.3 U$22.15
3HS1: 3H1.S 3L1.D JP18.3 R47.2
3HSO: C69.1 C87.1 D13.C R47.1 U$1.15
3LO: 3L.G R6.2 R37.2
3LO1: 3L1.G R23.2 R44.2
4: BAT3.+ BAT4.- JP7.2
5: BAT1.+ BAT2.- JP7.1
5V1: C7.1 C9.1 C31.1 C41.1 C59.1 C67.1 DI1.16 DI2.8 DI3.8 P3.4 P5.3
5V2: C28.1 C40.1 C42.1 C44.1 C46.1 C48.1 C60.1 DI1.1 DI2.1 DI2.3 DI3.1 DI3.3 J2.2 J3.8 J4.3 J5.5 J6.2 J8.1 J9.1 J12.2 J13.1 J15.2 J17.3 J18.3 P1.3 P2.7 P4.3 R7.2 R8.2 R9.2 R24.1 R25.1 R70.1
5V3: C77.1 C80.1 DI4.1 DI5.1 DI5.3 J23.1 J24.2
5V4: C74.1 C78.1 C79.1 DI4.16 DI5.8 P6.4
15V: C10.1 C29.1 C30.1 D1.A D2.A D3.A P3.5 U$22.20
15V1: C72.1 C73.1 C75.1 D6.A D8.A D11.A P6.5 U$1.20
15V2: R15.1
15V5: R16.1
24V: 1H.D 2H.D 3H.D C8.1 C39.1 C61.1 C62.1 C64.1 C65.1 C66.1 D7.C D14.C J7.2 J14.1 J20.1 J21.2 JP2.2 JP3.1 JP4.2 JP17.1 P2.1 P2.2 P3.1 P5.1
24V1: 1H1.D 2H1.D 3H1.D C76.1 C81.1 C82.1 C83.1 C84.1 D16.C J22.1 JP19.2 P6.1
CTS: PIC1.49 XBEE.12
FAULT: C4.1 PIC1.16 R3.1 U$37.13
GND1: C7.2 C8.2 C9.2 C10.2 C16.1 C29.2 C30.2 C31.2 C39.2 C41.2 C59.2 C66.2 C67.2 DI1.9 DI2.5 DI2.7 DI3.5 DI3.7 J7.1 J20.2 JP1.2 JP2.1 JP3.2 JP4.1 JP5.1 JP11.1 JP12.1 M1.S M2.S P2.3 P3.3 P3.PAD P3.PAD2 P5.2 P5.4 U$22.6 U$22.10 U$37.5 U$37.6 U$37.7 U$37.8
GND2: C1.2 C2.2 C3.2 C4.2 C5.2 C6.2 C11.2 C12.2 C13.2 C14.2 C15.- C20.2 C21.1 C22.2 C23.2 C24.2 C25.1 C26.2 C27.2 C28.2 C32.2 C33.2 C34.2 C35.2 C36.2 C37.2 C38.2 C40.2 C42.2 C43.2 C44.2 C45.2 C46.2 C47.2 C48.2 C49.2 C50.2 C51.2 C52.2 C53.2 C54.2 C55.2 C56.2 C57.2 C58.2 C60.2 C63.- DI1.8 DI2.4 DI3.4 IMU1.1 IMU1.11 IMU1.15 IMU1.17 IMU1.18 J2.4 J3.7 J4.2 J5.4 J6.1 J8.2 J9.2 J10.1 J11.1 J12.1 J13.2 J15.1 J17.1 J18.1 J19.1 JP8.1 JP9.1 JP10.1 JP13.1 JP14.1 MAINRESET.2 P1.1 P2.5 P4.1 PIC1.9 PIC1.20 PIC1.25 PIC1.41 PIC2.9 PIC2.20 PIC2.25 PIC2.41 PROG.3 PROG_1.3 R2.2 R42.1 R73.1 RESET_2.2 U$16.1 U$16.11 U$16.15 U$16.17 U$16.18 U$37.9 U$37.16 XBEE.10
GND3: C68.1 C72.2 C73.2 C74.2 C75.2 C76.2 C78.2 C79.2 DI4.9 DI5.5 DI5.7 JP19.1 JP20.1 M3.S P6.3 P6.PAD P6.PAD2 U$1.6 U$1.10
GND4: C77.2 C80.2 DI4.8 DI5.4 J23.2 J24.1
HALL1: J5.3 PIC1.51 R9.1
HALL2: J5.2 PIC1.52 R8.1
HALL3: J5.1 PIC1.53 R7.1
I_SENSE: PIC1.21 U$37.12
IMU_INT1: IMU1.12 PIC1.35
IMU_INT2: PIC2.35 U$16.12
LED1: LED1.CAT PIC1.43
LED1_2: LED1_2.CAT PIC2.43
LED2: LED2.CAT PIC1.44
LED2_2: LED2_2.CAT PIC2.44
LED3: LED3.CAT PIC1.45
LED3_2: LED3_2.CAT PIC2.45
LED4: LED4.CAT PIC1.46
LED4_2: LED4_2.CAT PIC2.46
LOW_MAG: DI3.2 PIC2.49
LOW_MAG_2: DI3.6 M2.G
LOW_MAGA: J17.2 PIC2.23
LOW_MAGB: J17.4 PIC2.22
MCLR1: MAINRESET.1 PIC1.7 PROG.1 R14.1
MCLR_2: PIC2.7 PROG_1.1 R61.1 RESET_2.1
MOTA: J18.2 PIC2.34
MOTB: J18.4 PIC2.33
MOTOR-: 1L.S 2L.S 3L.S C61.2 C62.2 C64.2 C65.2 D5.A D10.A D20.A JP1.1 JP5.2 R4.1 R5.1 R6.1 U$37.1 U$37.2 U$37.3 U$37.4
MOTOR-1: 1L1.S 2L1.S 3L1.S C81.2 C82.2 C83.2 C84.2 C85.2 C86.2 C87.2 D12.A D13.A D15.A JP20.2 R32.1 R33.1 R44.1
N$1: R15.2 U$1.7
N$2: R16.2 U$22.7
N$3: C16.2 U$22.9
N$4: R11.2 XBEE.13
N$5: R1.1 R2.1 U$37.15
N$6: C68.2 U$1.9
N$7: C2.1 U$37.10
N$8: C3.1 U$37.11
N$9: R10.2 XBEE.20
N$10: R10.1 XLED1.AN
N$11: LED1.AN R17.2
N$12: LED2.AN R18.2
N$13: LED3.AN R19.2
N$14: R20.1 U$1.24
N$15: C38.1 L1.2 PIC1.19
N$16: C15.+ PIC1.56
N$17: LED4.AN R31.2
N$18: J11.2 R24.2
N$19: J10.2 R25.2
N$20: C47.1 C49.1 JP16.1 P4.2 P4.4 U$73.2 U$73.5
N$21: C25.2 U$16.10
N$22: C27.1 U$16.20
N$23: R21.1 U$1.22
N$24: C21.2 IMU1.10
N$25: C23.1 IMU1.20
N$26: R34.1 U$22.24
N$27: R11.1 XLED2.AN
N$28: R22.1 U$1.21
N$29: R23.1 U$1.19
N$30: R12.2 XBEE.15
N$31: R12.1 XLED3.AN
N$32: R13.2 XBEE.6
N$33: R26.1 U$1.17
N$34: R27.1 U$1.14
N$35: R35.1 U$22.22
N$36: R36.1 U$22.21
N$37: R37.1 U$22.19
N$38: R38.1 U$22.17
N$39: R13.1 XLED4.AN
N$40: C69.2 R28.1 U$1.13
N$41: C70.2 R29.1 U$1.16
N$42: C71.1 R30.1 U$1.1
N$43: D11.C R30.2
N$44: D8.C R29.2
N$45: D6.C R28.2
N$46: D16.A J22.2 M3.D
N$48: R39.1 U$22.14
N$50: C17.2 R40.1 U$22.13
N$52: C18.2 R41.1 U$22.16
N$54: C19.1 R43.1 U$22.1
N$55: D3.C R43.2
N$57: D14.A J14.2 M1.D
N$58: D2.C R41.2
N$59: D1.C R40.2
N$60: D4.A D5.C
N$61: D9.A D10.C
N$62: D19.A D20.C
N$63: D7.A J21.1 M2.D
N$104: C63.+ PIC2.56
N$108: LED1_2.AN R66.2
N$109: LED2_2.AN R67.2
N$110: LED3_2.AN R68.2
N$111: LED4_2.AN R69.2
N$112: J19.2 R70.2
PGEC1: PIC1.17 PROG.5
PGEC1_2: PIC2.17 PROG_1.5
PGED1: PIC1.18 PROG.4
PGED1_2: PIC2.18 PROG_1.4
PWM1H: DI1.2 J3.1 J12.8 PIC1.61
PWM1H1: DI4.2 J24.8
PWM1HO: DI1.15 U$22.2
PWM1HO1: DI4.15 U$1.2
PWM1L: DI1.3 J3.2 J12.7 PIC1.60
PWM1L1: DI4.3 J24.7
PWM1LO: DI1.14 U$22.3
PWM1LO1: DI4.14 U$1.3
PWM2H: DI1.5 J3.4 J12.5 PIC1.63
PWM2H1: DI4.5 J24.5
PWM2HO: DI1.12 U$22.5
PWM2HO1: DI4.12 U$1.5
PWM2L: DI1.4 J3.3 J12.6 PIC1.62
PWM2L1: DI4.4 J24.6
PWM2LO: DI1.13 U$22.4
PWM2LO1: DI4.13 U$1.4
PWM3H: DI1.7 J3.6 J12.3 PIC1.1
PWM3H1: DI4.7 J24.3
PWM3HO: DI1.10 U$22.12
PWM3HO1: DI4.10 U$1.12
PWM3L: DI1.6 J3.5 J12.4 PIC1.64
PWM3L1: DI4.6 J24.4
PWM3LO: DI1.11 U$22.11
PWM3LO1: DI4.11 U$1.11
RTS: PIC1.50 XBEE.16
RX: PIC1.55 XBEE.2
SCL1: IMU1.23 PIC1.37
SCL1_2: PIC2.37 U$16.23
SCL2: J1.1 PIC1.32 R77.1
SCL2_2: J16.2 PIC2.31
SDA1: IMU1.24 PIC1.36
SDA1_2: PIC2.36 U$16.24
SDA2: J1.2 PIC1.31 R78.1
SDA2_2: J16.1 PIC2.32
TOP_MAG: DI2.2 J4.1 J13.3 PIC1.58
TOP_MAG1: DI5.2 J23.3
TOP_MAGA: J2.3 PIC1.33
TOP_MAGB: J2.1 PIC1.34
TOP_MAGO: DI2.6 M1.G
TOP_MAGO1: DI5.6 M3.G
TX: PIC1.54 XBEE.3
USER: MAINUSER.2 PIC1.42 R42.2
USER_2: PIC2.42 R73.2 USER_2.2

## Tracks (layer width: path | path; a pad name or v marks a point on that pad's centre or on a via)
1
  pour Top (isolate 0.381, no thermals): 3.81,117.73 arc45 4.24,117.91 7.94,121.61 arc-45 8.39,121.79 27.94,121.79 arc90 28.57,122.43 28.57,151.13 arc90 27.94,151.76 10.16,151.76 arc90 9.53,151.13 9.53,126.63 arc-45 9.34,126.18 2.98,119.82 arc45 2.79,119.37 2.79,118.36 arc90 3.43,117.73
1HO
  Top 0.203: 1H.G 144.36,57.4
  Top 0.762: R34.2 144.36,57.21 1H.G
1HO1
  Top 0.203: 1H1.G 148.17,133.6
  Top 0.762: R20.2 148.17,133.41 1H1.G
1HS  (via drill 0.6)
  Top 0.508: v133.6,44.58 132.99,44.58 arc45 132.63,44.43 131.95,43.75 arc-45 131.59,43.6 C19.2 126.36,43.6 arc45 126,43.45 124.61,42.06 arc-45 124.25,41.91 121.79,41.91 arc90 121.28,41.4 121.28,39.88 arc90 121.79,39.37 U$22.23
  Bottom 0.508: v133.6,44.58 139,44.58 arc90 139.51,45.09 139.51,47.56 | 139.51,47.56 arc-90 140.02,48.07 | 140.4,48.07 139.51,48.07 139.51,47.56
  pour Bottom (no thermals): 147.83,41.66 153.29,41.66 153.29,56.64 arc90 152.02,57.91 146.81,57.91 146.56,47.88 arc-90 147.83,46.61
  pour Bottom (no thermals): 151.51,43.43 arc-90 153.29,41.66 arc-90 151.51,39.88 arc-90 149.73,41.66 arc-90
  pour Bottom (no thermals): 139.32,53.72 139.32,47.88 150.75,47.88 150.75,57.91 144.4,57.91 144.4,54.36 arc-90 143.76,53.72
  pour Bottom (no thermals): 147.83,41.66 arc90 149.61,39.88 151.51,39.88 151.51,41.66
  pour Top (no thermals): 151.51,43.43 arc-90 153.29,41.66 arc-90 151.51,39.88 arc-90 149.73,41.66 arc-90
  pour Top (no thermals): 149.73,41.66 153.29,41.66 153.29,62.87 arc90 152.02,64.14 149.73,64.14
  pour Top (no thermals): 142.37,63.5 142.37,60.45 arc90 143,59.82 146.05,59.82 arc-90 146.69,59.18 146.69,46.99 arc90 147.32,46.35 147.83,46.35 arc-90 149.73,44.45 150.11,44.45 150.11,59.82 arc90 150.75,60.45 150.75,64.14 143,64.14 arc90
1HS1
  pour Bottom (no thermals): 151.64,117.86 157.1,117.86 157.1,132.84 arc90 155.83,134.11 150.62,134.11 150.37,124.08 arc-90 151.64,122.81
  pour Bottom (no thermals): 155.32,119.63 arc-90 157.1,117.86 arc-90 155.32,116.08 arc-90 153.54,117.86 arc-90
  pour Bottom (no thermals): 143.13,129.92 143.13,124.08 154.56,124.08 154.56,134.11 148.21,134.11 148.21,130.56 arc-90 147.57,129.92
  pour Bottom (no thermals): 151.64,117.86 arc90 153.42,116.08 155.32,116.08 155.32,117.86
  pour Top (no thermals): 155.32,119.63 arc-90 157.1,117.86 arc-90 155.32,116.08 arc-90 153.54,117.86 arc-90
  pour Top (no thermals): 153.54,117.86 157.1,117.86 157.1,139.06 arc90 155.83,140.34 153.54,140.34
  pour Top (no thermals): 146.18,139.7 146.18,136.65 arc90 146.81,136.02 149.86,136.02 arc-90 150.5,135.38 150.5,123.19 arc90 151.13,122.56 151.64,122.56 arc-90 153.54,120.65 153.92,120.65 153.92,136.02 arc90 154.56,136.65 154.56,140.34 146.81,140.34 arc90
1HSO  (via drill 0.6)
  Top 0.508: v137.41,120.78 136.8,120.78 arc45 136.44,120.63 135.76,119.95 arc-45 135.4,119.8 C71.2 130.17,119.8 arc45 129.81,119.65 128.42,118.26 arc-45 128.06,118.11 125.6,118.11 arc90 125.09,117.6 125.09,116.08 arc90 125.6,115.57 U$1.23
  Bottom 0.508: v137.41,120.78 141.73,120.78 arc90 142.24,121.28 142.24,130.35 arc-45 142.39,130.71 D12.C
  Bottom 1.016: D12.C R46.1
  Bottom 1.27: C85.1 arc-90 145.03,135.14 D12.C
1LO
  Bottom 0.203: 1L.G 135.47,48.51
  pour Bottom (no thermals): 132.87,50.42 136.8,50.42 arc-90 137.62,49.63 137.62,46.69 arc-90 136.8,45.87 134.37,45.87 134.37,48.97 arc90 133.86,49.48 132.87,49.48
1LO1
  Bottom 0.203: 139.28,124.71 1L1.G
  pour Bottom (no thermals): 136.68,126.62 140.54,126.62 arc-90 141.35,125.83 141.35,122.89 arc-90 140.54,122.07 138.18,122.07 138.18,125.17 arc90 137.67,125.68 136.68,125.68
2
  pour Top (isolate 0.381, no thermals): 3.56,117.22 4.94,117.22 arc45 5.39,117.41 6.6,118.49 8.45,120.46 arc-45 8.9,120.65 31.11,120.65 arc90 31.75,121.28 31.75,151.13 arc-90 32.38,151.76 69.85,151.76 arc-90 70.48,151.13 70.48,117.47 arc-90 69.85,116.84 7.63,116.84 arc45 7.18,116.65 5.9,115.38 arc-45 5.45,115.19 3.56,115.19 arc-90 2.92,115.82 2.92,116.59 arc-90
2HO
  Top 0.762: R38.2 144.36,39.43 2H.G
2HO1
  Top 0.762: R26.2 148.17,115.63 2H1.G
2HS  (via drill 0.6)
  Top 0.508: U$22.18 124.25,33.02 arc45 124.61,33.17 126.72,35.28 arc-45 127.08,35.43 128.78,35.43 arc90 129.29,35.94 129.29,36.74 arc-90 129.79,37.25 C18.1 132.46,37.25 arc90 132.97,37.76 v132.97,38.61
  Bottom 0.254: 132.97,38.48 arc90 133.48,37.97 138.3,37.97
  Bottom 0.508: 139.51,36.26 arc90 140.02,35.75 140.53,35.75 | v132.97,38.61 132.97,38.48 | 138.3,37.97 139,37.97 arc-90 139.51,37.47 139.51,35.12
  pour Top (no thermals): 151.51,39.24 arc-90 153.29,37.47 arc-90 151.51,35.69 arc-90 149.73,37.47 arc-90
  pour Bottom (no thermals): 151.51,39.24 arc-90 153.29,37.47 arc-90 151.51,35.69 arc-90 149.73,37.47 arc-90
  pour Bottom (no thermals): 146.05,40.13 147.09,40.13 arc-45 148.17,39.69 arc45 149.25,39.24 151.51,39.24 151.51,35.69 arc90 149.1,33.27 149.1,31.37 arc-90 147.83,30.1 146.05,30.1
  pour Bottom (no thermals): 139.32,35.94 139.32,30.1 146.56,30.1 146.56,40.13 144.4,40.13 144.4,36.58 arc-90 143.76,35.94
  pour Top (no thermals): 142.37,45.09 142.37,41.78 arc90 143,41.15 146.69,41.15 146.43,45.72 143,45.72 arc90
  pour Top (no thermals): 145.16,45.72 147.83,45.72 arc-90 149.1,44.45 149.1,41.66 arc90 151.51,39.24 151.51,35.69 149.1,35.69 arc-90 146.69,38.1 146.69,40.51 arc90 146.05,41.15 145.16,41.15
2HS1
  pour Top (no thermals): 155.32,115.44 arc-90 157.1,113.67 arc-90 155.32,111.89 arc-90 153.54,113.67 arc-90
  pour Bottom (no thermals): 155.32,115.44 arc-90 157.1,113.67 arc-90 155.32,111.89 arc-90 153.54,113.67 arc-90
  pour Bottom (no thermals): 149.86,116.33 150.9,116.33 arc-45 151.98,115.89 arc45 153.06,115.44 155.32,115.44 155.32,111.89 arc90 152.91,109.47 152.91,107.57 arc-90 151.64,106.3 149.86,106.3
  pour Bottom (no thermals): 143.13,112.14 143.13,106.3 150.37,106.3 150.37,116.33 148.21,116.33 148.21,112.78 arc-90 147.57,112.14
  pour Top (no thermals): 146.18,121.28 146.18,117.98 arc90 146.81,117.35 150.5,117.35 150.24,121.92 146.81,121.92 arc90
  pour Top (no thermals): 148.97,121.92 151.64,121.92 arc-90 152.91,120.65 152.91,117.86 arc90 155.32,115.44 155.32,111.89 152.91,111.89 arc-90 150.5,114.3 150.5,116.71 arc90 149.86,117.35 148.97,117.35
2HSO  (via drill 0.6)
  Top 0.508: U$1.18 128.06,109.22 arc45 128.42,109.37 130.53,111.48 arc-45 130.89,111.63 132.59,111.63 arc90 133.1,112.14 133.1,112.94 arc-90 133.6,113.45 C70.1 136.27,113.45 arc90 136.78,113.96 v136.78,114.81
  Bottom 0.508: v136.78,114.81 136.78,114.68 arc90 137.29,114.17 144.52,114.17 arc90 145.03,114.68 D15.C
  Bottom 1.016: R45.1 D15.C
  Bottom 1.27: C86.1 arc-90 145.03,117.36 D15.C
2LO
  pour Bottom (no thermals): 132.87,32.64 136.8,32.64 arc-90 137.62,31.85 137.62,28.91 arc-90 136.8,28.09 134.37,28.09 134.37,31.19 arc90 133.86,31.7 132.87,31.7
2LO1
  pour Bottom (no thermals): 136.68,108.84 140.61,108.84 arc-90 141.43,108.05 141.43,105.11 arc-90 140.61,104.29 138.18,104.29 138.18,107.39 arc90 137.67,107.9 136.68,107.9
3
  pour Top (isolate 0.381, no thermals): 2.79,114.05 2.79,113.28 arc90 3.43,112.65 6.47,112.65 arc-45 6.92,112.46 7.69,111.69 arc45 8.14,111.51 90.81,111.51 arc90 91.44,112.14 91.44,151.13 arc90 90.81,151.76 74.3,151.76 arc90 73.66,151.13 73.66,116.46 arc-90 73.03,115.82 8.14,115.82 arc45 7.69,115.64 6.92,114.87 arc-45 6.47,114.68 3.43,114.68 arc90
3.3V  (via drill 0.6)  (1 unrouted)
  Top 0.203: C6.1 20.35,20.32 arc45 20.49,20.38 XBEE.1 | XLED3.CAT XLED1.CAT | 31.02,18.44 XLED2.CAT | 31.02,18.44 arc-45 31.08,18.3 | XLED4.CAT 31.02,18.44 | 172.43,40.56 arc-45 172.57,40.62 U$16.13 | PIC2.19 190.07,39.58 arc-45 190.37,40.3 C54.1 | PIC1.57 21.84,31.75 arc45 21.9,31.61 C12.1
  Top 0.254: 5.46,53.47 5.33,53.47 arc-90 5.08,53.72 | 9.14,55.63 arc90 8.89,55.88 8.19,55.88 arc-90 7.94,56.13 | 9.14,55.63 IMU1.3 | 9.14,55.63 arc-90 9.39,55.88 9.78,55.88 | C26.1 arc90 172.43,40.56 | 42.55,50.8 arc-90 42.29,51.05 | 42.55,50.8 R14.2 | 42.55,50.8 arc90 42.29,50.55 42.29,48.94 arc-90 42.04,48.68 41.91,48.68 | PIC1.38 13.04,40.62 arc-45 12.86,40.69 C34.1 | C20.1 5.08,53.07 arc90 5.33,52.82 5.96,52.82 | PIC2.26 186.57,39.88 arc90 186.32,40.13 185.46,40.13 arc-90 185.21,40.39 C51.1 | PIC2.10 194.18,33.77 arc90 194.44,34.02 194.44,34.89 arc-90 194.69,35.14 C53.1 | PIC2.57 187.57,25.65 arc90 187.83,25.4 189.61,25.4 arc-90 189.87,25.15 C50.1 | PIC2.38 176.78,34.27 arc90 176.53,34.02 C52.1 | PIC1.26 20.84,46.23 arc90 20.59,46.48 19.72,46.48 arc-90 19.47,46.74 C36.1 | PIC1.10 29.75,40.12 arc90 C35.1 | U$16.3 180.21,39.12 arc90 180.47,39.37 180.47,44.58 arc90 180.19,44.86 177.72,44.86 | v170.1,44.86 177.17,44.86 | 177.17,44.86 177.72,44.86 | 177.17,44.86 arc-45 176.69,44.98 | 177.72,44.86 arc90 177.22,44.35 177.22,43.38 | 177.22,44.76 177.24,44.76 | 177.22,44.76 arc90 177.09,44.63 | 177.22,44.76 177.22,44.81 arc90 177.17,44.86 | IMU1.9 5.97,52.32 arc-90 5.71,52.57 | 5.71,52.57 5.71,52.82 | 5.96,52.82 IMU1.8 | 5.96,52.82 arc90 5.71,52.57 | 5.71,52.57 arc90 5.47,52.82 | U$16.9 176.15,41.99 arc-90 176.4,42.24 | 176.4,42.24 arc-90 176.65,41.99 | 176.4,42.24 arc90 176.65,42.49 176.65,42.77 arc-45 176.72,42.95 C24.1 176.9,43.18 arc90 176.65,42.93 U$16.8 | JP15.1 184.95,53.34 arc90 184.7,53.09
  Top 0.279: 7.94,56.13 arc90 7.68,55.88 7.68,55.82
  Top 0.305: 8.1,48.24 C22.1 7.73,48.57 arc-45 7.64,48.79 IMU1.13 | C13.1 C34.1
  Top 0.381: 7.37,46.43 arc-90 7.75,45.92 7.75,45.47 | 7.37,46.43 MAINUSER.1 | 7.37,46.43 arc90 7.75,46.94 7.75,47.24 arc90 8.04,47.54 C22.1
  Top 0.508: R17.1 R18.1 R19.1 R31.1 14.1,27.09 arc90 14.61,27.6 v14.61,28.96 | C24.1 | 169.86,33.08 169.86,36.83 | 169.86,33.08 169.86,28.97 arc90 USER_2.1 168.17,27.27 arc45 168.02,26.92 168.02,16.17 arc90 168.53,15.66 R66.1 R67.1 R68.1 R69.1 | 169.86,33.08 arc-90 170.37,33.59 176.66,33.59 176.66,33.74 arc90 C52.1 | v196.85,41.27 C54.1 | XLED3.CAT 31.6,7.54 arc45 31.75,7.9 31.75,9.19 arc-45 31.87,9.52 32.37,10.02 arc-45 33.09,10.31 | 32.62,10.27 arc45 32.77,10.62 32.77,12.7 | 32.62,10.27 32.87,10.52 arc45 33.02,10.88 33.02,11.6 | 32.62,10.27 32.53,10.18 arc-45 32.91,10.32 33.05,10.32 arc-45 33.09,10.31 | XLED4.CAT 28.72,20.74 arc-45 28.57,21.1 28.57,23.06 | 28.07,23.57 arc-90 28.57,23.06 | 28.07,23.57 26.67,23.57 | 28.07,23.57 arc90 27.94,23.7 28.07,23.7 | 28.57,23.06 28.57,23.11 arc-90 29.34,23.88 | 28.07,23.57 28.4,23.57 | 41.61,47.96 arc-90 41.24,47.59 41.05,47.59 | 39.88,45.47 39.88,45.21 arc90 v40.01,45.09 | 33.09,10.31 36.58,10.31
  Top 0.61: R3.2 35.1,50.84 arc-45 34.92,51.27 U$37.14 34.92,56.96 arc-90 35.53,57.57 C1.1
  Top 0.762: v14.73,56.01 14.73,53.98 arc90 15.49,53.21 | 15.49,53.21 v16.76,53.21 | 15.49,53.21 arc90 14.73,52.45 | v19.43,53.21 arc-90 19.43,53.09 C33.1 C36.1 | v14.73,46.35 v14.73,56.01 | C35.1 C11.1 33.53,40.22 arc45 33.89,40.37 | 33.89,40.37 C14.1 | PROG.2 arc-45 37.25,38.19 34.92,40.51 arc-45 34.58,40.37 33.89,40.37 | L1.1 30.73,47.59 arc45 31.27,47.37 40.52,47.37 arc45 41.05,47.59 | 39.12,47.37 arc-90 39.88,46.61 39.88,45.47 | XBEE.1 28.07,23.7 arc90 28.57,24.08 v28.7,24.13 | v12.32,56.13 8.32,56.13 arc45 7.78,55.91 7.68,55.82 5.94,54.07 arc-45 5.4,53.85 5.08,53.85 C20.1 5.08,53.72 | C53.1 C32.1 arc90 198.75,35.77 v198.75,36.7 | C57.1 C50.1 | v14.73,56.01 14.73,64.14 arc90 13.97,64.9 13.25,64.9 arc-90 12.48,65.66 R77.2 v10.67,67.94 | v10.67,71.75 R78.2 | C12.1 C37.1 26.33,29.37 arc90 26.42,29.46 27.94,29.46 arc-90 28.7,28.7 v28.7,27.69 | v170.1,44.86 176.19,44.86 arc-90 176.95,44.09 C24.1
  Top 1.016: U$73.6 U$73.1 arc45 184.7,56.68 184.7,53.09 184.7,50.65 | 183.68,49.63 arc90 184.7,50.65 | 183.68,49.63 arc-90 184.7,48.62 | v178.87,49.63 183.68,49.63 | 184.7,50.65 184.7,48.62 | 184.7,48.62 arc-90 185.71,49.63 | v194.06,46.38 194.06,48.62 arc90 193.04,49.63 185.71,49.63 | 184.7,50.65 arc90 185.71,49.63 | 33.02,23.11 33.02,11.6 arc90 34.04,10.58 36.62,10.58 arc45 C45.1 arc45 37.03,10.58 C43.1 40.18,10.58 arc-45 40.9,10.28 41.38,9.8 arc45 42.1,9.5 P1.2 | 33.02,23.11 arc90 32,24.13 | v9.91,35.56 12.28,35.56 arc-45 13,35.26 14.31,33.95 arc-45 14.61,33.23 v14.61,28.96 | C13.1 8.04,41.49 v8.04,41.53 8.04,45.81 | 8.04,44.11 arc-90 v8.89,44.96 arc-90 8.04,45.81 | 8.04,45.81 C22.1 | 33.02,23.11 33.02,23.71 arc-45 33.32,24.43 | R1.2 C1.1 C5.1 41.91,48.68 arc-45 41.61,47.96 40.3,46.65 arc45 40.01,45.93 v40.01,45.09 | R61.2 197.91,26.67 arc45 197.19,26.37 v196.47,25.65 194.82,24.01 arc-45 194.1,23.71 C57.1 | C52.1 C55.1 171.12,33.87 arc-90 170.1,34.89 170.1,41.24 | 184.7,48.62 184.7,46.46 arc-45 C58.1 184.91,46.1 arc-45 185.21,45.38 C56.1 C51.1 | 170.1,41.24 arc90 171.12,40.22 | 170.1,41.24 v170.1,44.86 arc-90 170.08,44.83 170.05,44.83 | 171.12,40.22 arc90 170.1,39.2 | 171.12,40.22 C26.1 | v39.24,28.57 37.89,28.57 arc45 37.17,28.28 33.32,24.43 | v28.7,24.13 32.6,24.13 arc45 33.32,24.43
  Top 1.499: P1.2 48.81,9.5 arc45 P1.4
  Bottom 0.508: 197.99,41.27 arc90 198.5,41.78 arc90 198.75,42.04 198.75,45.36 | 197.99,41.27 v196.85,41.27 | 197.99,41.27 arc-90 198.5,40.77
  Bottom 0.762: v8.89,44.96 12.26,44.96 arc45 12.8,45.18 13.75,46.13 arc-45 14.29,46.35 v14.73,46.35 | v14.73,56.01 arc45 14.43,56.13 v12.32,56.13 | v16.76,53.21 v19.43,53.21 | v10.67,67.94 v10.67,71.75
  Bottom 1.016: v178.87,49.63 178.87,45.87 arc-90 177.85,44.86 v170.1,44.86 | 198.75,34.04 arc90 199.77,33.02 | 199.77,33.02 arc90 198.75,32 | 198.75,34.04 198.75,28.41 arc-45 198.46,27.69 arc-45 198.42,27.61 v196.47,25.65 | 27.69,26.67 arc-90 28.7,25.65 | v9.91,35.56 7.54,37.93 arc-45 7.24,38.65 7.24,40.31 arc-45 7.54,41.03 v8.04,41.53 | 38.23,38.1 arc90 39.24,39.12 | 38.23,38.1 PROG.2 | 39.24,37.08 arc90 38.23,38.1 | v39.24,28.57 39.24,37.08 | 39.24,37.08 39.24,43.9 arc-45 39.54,44.62 v40.01,45.09 | v28.7,27.69 arc90 28.7,27.56 | 28.7,25.65 28.7,27.56 | 28.7,25.65 v28.7,24.13 | 27.69,26.67 arc90 v28.7,27.69 | v28.7,27.69 28.7,27.56 | 198.75,34.04 v198.75,36.7 198.75,45.36 arc90 197.74,46.38 v194.06,46.38 | 199.77,33.02 PROG_1.2 | 27.69,26.67 23.88,26.67 arc-90 22.86,27.69 22.86,27.94 arc90 21.84,28.96 v14.61,28.96
3HO
  Top 0.762: R39.2 144.36,21.65 3H.G
3HO1
  Top 0.762: R27.2 148.17,97.85 3H1.G
3HS  (via drill 0.6)
  Top 0.508: U$22.15 124.12,29.21 arc-45 124.48,29.06 125.83,27.71 arc-45 125.98,27.35 125.98,24.85 arc90 126.49,24.34 C17.1 132.72,24.34 arc90 133.22,24.85 v133.22,25.4
  Bottom 0.508: 146.37,25.4 arc90 146.88,25.91 | v133.22,25.4 146.37,25.4 | 146.37,25.4 arc-90 146.88,24.89
  pour Bottom (no thermals): 149.73,33.27 153.29,33.27 153.29,12.95 arc-90 152.65,12.32 147.07,12.32 arc-90 146.43,12.95 146.43,22.35 148.46,22.35 arc90 149.73,23.62
  pour Bottom (no thermals): 139.32,18.16 139.32,12.32 150.75,12.32 150.75,22.35 144.4,22.35 144.4,18.8 arc-90 143.76,18.16
  pour Bottom (no thermals): 151.51,35.05 arc-90 153.29,33.27 arc-90 151.51,31.5 arc-90 149.73,33.27 arc-90
  pour Top (no thermals): 151.51,35.05 arc-90 153.29,33.27 arc-90 151.51,31.5 arc-90 149.73,33.27 arc-90
  pour Top (no thermals): 142.37,27.3 142.37,24.26 arc90 143,23.62 152.65,23.62 arc90 153.29,24.26 153.29,33.27 149.73,33.27 149.73,29.21 arc-90 148.46,27.94 143,27.94 arc90
  pour Top (no thermals): 144.65,27.94 146.05,27.94 arc90 146.69,28.57 146.69,33.27 arc-90 148.46,35.05 151.51,35.05 151.51,27.56 144.65,27.56
  pour Bottom (no thermals): 149.73,32.38 149.73,31.11 arc-90 147.83,29.21 147.32,29.21 arc90 146.69,28.57 146.69,22.99 arc-90 146.05,22.35 144.91,22.35 144.91,21.59 151.89,21.59 151.89,32.38
3HS1
  Bottom 0.508: 150.69,102.11 arc-90 150.18,101.6 arc-90 150.69,101.09
  pour Bottom (no thermals): 153.54,109.47 157.1,109.47 157.1,89.15 arc-90 156.46,88.52 150.88,88.52 arc-90 150.24,89.15 150.24,98.55 152.27,98.55 arc90 153.54,99.82
  pour Bottom (no thermals): 143.13,94.36 143.13,88.52 154.56,88.52 154.56,98.55 148.21,98.55 148.21,95 arc-90 147.57,94.36
  pour Bottom (no thermals): 155.32,111.25 arc-90 157.1,109.47 arc-90 155.32,107.7 arc-90 153.54,109.47 arc-90
  pour Top (no thermals): 155.32,111.25 arc-90 157.1,109.47 arc-90 155.32,107.7 arc-90 153.54,109.47 arc-90
  pour Top (no thermals): 146.18,103.5 146.18,100.46 arc90 146.81,99.82 156.46,99.82 arc90 157.1,100.46 157.1,109.47 153.54,109.47 153.54,105.41 arc-90 152.27,104.14 146.81,104.14 arc90
  pour Top (no thermals): 148.46,104.14 149.86,104.14 arc90 150.5,104.78 150.5,109.47 arc-90 152.27,111.25 155.32,111.25 155.32,103.76 148.46,103.76
  pour Bottom (no thermals): 153.54,108.58 153.54,107.31 arc-90 151.64,105.41 151.13,105.41 arc90 150.5,104.78 150.5,99.19 arc-90 149.86,98.55 148.72,98.55 148.72,97.79 155.7,97.79 155.7,108.58
3HSO  (via drill 0.6)
  Top 0.508: U$1.15 127.93,105.41 arc-45 128.29,105.26 129.65,103.91 arc-45 129.79,103.55 129.79,101.05 arc90 130.3,100.55 C69.1 136.53,100.55 arc90 137.03,101.05 v137.03,101.6
  Bottom 0.508: C87.1 144.28,101.6 arc90 143.77,102.11 137.75,102.11 arc45 137.39,101.96 v137.03,101.6
  Bottom 1.016: D13.C R47.1
  Bottom 1.27: C87.1 arc-90 145.03,99.58 D13.C
3LO
  pour Bottom (no thermals): 132.87,14.86 136.8,14.86 arc-90 137.62,14.07 137.62,12.19 132.87,12.19
3LO1
  pour Bottom (no thermals): 136.68,91.06 140.61,91.06 arc-90 141.43,90.27 141.43,88.39 136.68,88.39
4
  pour Top (isolate 0.381, no thermals): 3.56,110.11 4.94,110.11 arc-45 5.39,109.92 8.45,106.87 arc45 8.9,106.68 52.07,106.68 arc-90 52.7,106.05 52.7,76.2 arc90 53.34,75.56 90.81,75.56 arc90 91.44,76.2 91.44,109.86 arc90 90.81,110.49 7.63,110.49 arc-45 7.18,110.68 5.9,111.95 arc45 5.45,112.14 3.56,112.14 arc90 2.92,111.51 2.92,110.74 arc90
5
  pour Top (no thermals): 3.81,109.6 arc-45 4.24,109.42 7.94,105.72 arc45 8.39,105.54 48.9,105.54 arc-90 49.53,104.9 49.53,76.2 arc-90 48.9,75.56 10.16,75.56 arc-90 9.53,76.2 9.53,100.7 arc45 9.34,101.15 2.98,107.51 arc-45 2.79,107.96 2.79,108.97 arc-90 3.43,109.6
5V1  (1 unrouted)
  Top 0.406: 104.39,39.2 104.56,39.2 C59.1
  Top 0.508: C9.1 114.79,54.34 arc-45 114.94,53.98 P3.4 | DI1.16 107.7,37.47 arc90 108.2,37.97 108.2,41.53 | 108.2,41.53 arc90 107.7,42.04 | 108.2,41.53 arc-90 108.71,42.04 arc-90 108.97,42.29 109.39,42.29 | C41.1 arc-90 116.62,8.89 DI2.8 114.36,9.89 arc45 114.21,10.25 104.54,19.92 arc-45 104.39,20.28 104.39,39.2
  Top 0.61: DI3.8 186.69,8.72 arc-45 186.51,8.29 C31.1
  Top 1.016: P3.4 112.78,50.6 arc90 111.76,49.58 111.76,44.66 arc-45 111.46,43.94 110.11,42.59 arc-45 109.39,42.29 105.58,42.29 arc90 104.56,41.27 C59.1 | P5.3 175.38,7.54 arc-45 176.1,7.83 C7.1 178.69,8.72 arc-45 179.41,9.02 C67.1 181.31,9.02 arc-45 182.03,8.72 183.22,7.54 arc45 183.94,7.24 185.46,7.24 arc90 C31.1
5V2  (via drill 0.6)  (3 unrouted)
  Top 0.203: 38.1,3.81 arc45 38.05,3.94 | 38.1,3.81 | 38.1,3.96 38.1,3.81
  Top 0.254: J17.3 198.75,58.62 | 200.43,59.22 arc-90 200.38,59.27 200.38,59.3
  Top 0.406: v4.14,3.66 3.61,3.66 arc-90 2.79,4.47 2.79,60.42 arc-90 3.61,61.23 J2.2 | 38.1,3.96 arc90 37.8,3.66 37.8,1.97 | 37.9,4 arc-45 38.05,3.94 38.1,3.89 | 37.39,1.33 arc90 37.8,1.74 37.8,1.97 | 37.39,1.33 37.61,1.33 arc45 37.9,1.45 38.18,1.74 arc-45 38.47,1.85 44.42,1.85 | 37.8,1.97 38.12,1.97 | v31.13,1.33 37.39,1.33
  Top 0.508: P1.3 46,7.21 arc-90 v46.48,6.73 | v48.26,15.62 arc-90 47.78,15.14 J5.5 | v43.43,20.95 R7.2 | v43.43,19.05 R8.2 | v43.43,16.51 R9.2 | J3.8 45.85,32.37 arc-90 46.35,31.86 46.35,24.59 | v46.99,20.95 46.99,23.53 arc90 46.48,24.04 J4.3 45.85,24.04 arc90 46.35,24.54 46.35,24.59 | 46.35,24.59 arc45 46.5,24.23 46.86,23.88 | DI1.1 102.58,37.47 arc-90 103.08,36.96 C60.1 arc-90 103.12,26.63 103.12,24.38 | J12.2 99.8,25.38 arc-45 99.95,25.02 99.95,24.38 arc90 100.46,23.88 102.62,23.88 | J13.1 103.63,3.71 arc90 104.14,4.22 v104.14,6.35 106.05,6.35 arc-45 106.41,6.2 C40.1 | DI2.1 v104.14,8.89 103.63,8.89 arc-90 103.12,9.4 103.12,23.37 | DI2.3 107.36,6.35 arc45 106.91,6.16 C40.1 | C40.1 106.61,5.86 | DI3.1 187.9,16.57 arc-90 v188.59,15.88 | DI3.3 184.15,20.11 arc-90 C28.1 184.37,22.14 arc90 v184.28,22.23 | R70.1 201.08,58.12 arc90 200.57,58.62 198.75,58.62 198.7,58.62 | 44.42,1.85 44.43,1.86 arc45 44.45,1.91 J6.2 | 200.43,61.65 200.43,59.22 arc45 200.63,58.78 200.94,58.47 | 103.12,24.38 arc-90 102.62,23.88 | 103.12,23.37 103.12,24.38 | 103.12,23.37 arc90 102.62,23.88
  Top 0.61: J17.3 199.77,58.69 arc90 200.38,59.3 200.38,67.55
  Top 0.635: 200.38,67.55 200.38,69.47 arc90 199.87,69.98 C46.1
  Top 1.016: J6.2 39.12,2.17 arc-90 38.1,3.19 | 38.1,2.54 38.1,3.81 38.1,3.96 38.1,4 arc45 37.8,4.72 37.01,5.51 arc45 C44.1 38.35,5.58 arc90 39.37,6.6 C42.1 41.71,6.77 arc45 42.42,7.07 P1.3 | R25.1 63.75,7.83 arc90 64.77,8.85 64.77,11.58 | 64.77,11.58 arc90 63.75,12.6 61.33,12.6 arc-90 J8.1 | 64.77,11.58 arc-90 65.79,12.6 | R24.1 78.49,2.33 arc-90 77.47,3.34 77.47,13.56 | 77.47,13.56 arc90 76.45,14.58 76.2,14.58 | 76.2,14.58 75.77,14.58 | 78.49,14.61 arc90 77.47,13.59 77.47,13.56 | 76.45,14.97 76.45,14.83 arc-90 76.2,14.58 | 185.59,68.16 186.48,68.16 arc45 187.2,68.46 187.32,68.58 arc-45 187.84,68.8 C48.1 190.75,69.68 arc-45 191.47,69.98 C46.1
  Top 1.118: 185.59,68.16 arc-90 P4.3
  Top 1.524: J15.2 184.08,69.58 arc-45 184.23,69.52 P4.3
  Top 1.778: J8.1 72.39,12.97 arc90 74.93,15.51 P2.7 74.93,17.51 arc90 77.47,14.97 | 77.47,14.97 J9.1 | 74.45,14.02 74.65,14.23 arc-45 76.45,14.97 77.47,14.97
  Bottom 0.203: v43.43,20.95 43.56,21.08 | v43.43,19.05 43.56,19.05 | v43.43,16.51 43.43,16.64
  Bottom 0.406: v4.14,3.66 28.55,3.66 arc-45 28.98,3.48 v31.13,1.33
  Bottom 0.508: v46.48,6.73 47.75,6.73 arc90 48.26,7.24 v48.26,15.62 | 47.75,16.51 arc-90 48.26,16 v48.26,15.62 | 48.26,18.54 48.26,19.56 | 48.26,18.54 arc90 47.75,19.05 | v48.26,15.62 48.26,17.02 | 47.75,16.51 v43.43,16.51 | 48.26,17.02 arc-90 47.75,16.51 | 48.26,17.02 48.26,18.54 | 47.75,19.05 v43.43,19.05 | 48.26,19.56 arc-90 47.75,19.05 | 48.26,19.56 48.26,20.45 arc90 47.75,20.95 v46.99,20.95 v43.43,20.95 | v104.14,6.35 v104.14,8.89 | 167,51.29 167,16.38 arc90 167.51,15.88 v188.59,15.88 184.91,15.88 arc-90 184.28,16.51 | 167,51.29 arc-90 167.51,51.8 | J15.2 167.51,69.58 arc90 167,69.07 167,52.31 | 167,52.31 167,51.29 | 167.51,51.8 J18.3 | 167,52.31 arc90 167.51,51.8 | 184.28,16.51 arc-90 183.64,15.88 | 184.28,16.51 v184.28,22.23
5V3  (via drill 0.6)
  Top 0.508: DI4.1 106.39,113.67 arc-90 106.89,113.16 C80.1 arc-90 106.93,102.83 106.93,100.58 | J24.2 103.61,101.58 arc-45 103.76,101.22 103.76,100.58 arc90 104.27,100.08 106.43,100.08 | J23.1 107.44,79.92 arc90 107.95,80.42 v107.95,82.55 109.86,82.55 arc-45 110.22,82.4 C77.1 | DI5.1 v107.95,85.09 107.44,85.09 arc-90 106.93,85.6 106.93,99.57 | DI5.3 111.17,82.55 arc45 110.72,82.36 C77.1 | C77.1 110.42,82.06 | 106.93,100.58 arc-90 106.43,100.08 | 106.93,99.57 106.93,100.58 | 106.93,99.57 arc90 106.43,100.08
  Bottom 0.508: v107.95,82.55 v107.95,85.09
5V4
  Top 0.406: 108.2,115.4 108.37,115.4 C79.1
  Top 0.508: C74.1 118.6,130.54 arc-45 118.75,130.18 P6.4 | DI4.16 111.51,113.67 arc90 112.01,114.17 112.01,117.73 | 112.01,117.73 arc90 111.51,118.24 | 112.01,117.73 arc-90 112.52,118.24 arc-90 112.78,118.49 113.2,118.49 | C78.1 arc-90 120.44,85.09 DI5.8 118.17,86.09 arc45 118.02,86.45 108.35,96.12 arc-45 108.2,96.48 108.2,115.4
  Top 1.016: P6.4 116.59,126.8 arc90 115.57,125.78 115.57,120.86 arc-45 115.27,120.14 113.92,118.79 arc-45 113.2,118.49 109.39,118.49 arc90 108.37,117.47 C79.1
6
  pour Bottom (isolate 0.381, no thermals): 3.81,109.6 arc-45 4.24,109.42 7.94,105.72 arc45 8.39,105.54 48.9,105.54 arc-90 49.53,104.9 49.53,76.2 arc-90 48.9,75.56 10.16,75.56 arc-90 9.53,76.2 9.53,100.7 arc45 9.34,101.15 2.98,107.51 arc-45 2.79,107.96 2.79,108.97 arc-90 3.43,109.6
7
  pour Bottom (isolate 0.381, no thermals): 3.56,117.22 4.94,117.22 arc45 5.39,117.41 6.6,118.49 8.45,120.46 arc-45 8.9,120.65 31.11,120.65 arc90 31.75,121.28 31.75,151.13 arc-90 32.38,151.76 69.85,151.76 arc-90 70.48,151.13 70.48,117.47 arc-90 69.85,116.84 7.63,116.84 arc45 7.18,116.65 5.9,115.38 arc-45 5.45,115.19 3.56,115.19 arc-90 2.92,115.82 2.92,116.59 arc-90
8
  pour Bottom (isolate 0.381, no thermals): 3.81,117.73 arc45 4.24,117.91 7.94,121.61 arc-45 8.39,121.79 27.94,121.79 arc90 28.57,122.43 28.57,151.13 arc90 27.94,151.76 10.16,151.76 arc90 9.53,151.13 9.53,126.63 arc-45 9.34,126.18 2.98,119.82 arc45 2.79,119.37 2.79,118.36 arc90 3.43,117.73
9
  pour Bottom (isolate 0.381, no thermals): 2.79,114.05 2.79,113.28 arc90 3.43,112.65 6.47,112.65 arc-45 6.92,112.46 7.69,111.69 arc45 8.14,111.51 90.81,111.51 arc90 91.44,112.14 91.44,151.13 arc90 90.81,151.76 74.3,151.76 arc90 73.66,151.13 73.66,116.46 arc-90 73.03,115.82 8.14,115.82 arc45 7.69,115.64 6.92,114.87 arc-45 6.47,114.68 3.43,114.68 arc90
10
  pour Bottom (isolate 0.381, no thermals): 3.56,110.11 4.94,110.11 arc-45 5.39,109.92 8.45,106.87 arc45 8.9,106.68 52.07,106.68 arc-90 52.7,106.05 52.7,76.2 arc90 53.34,75.56 90.81,75.56 arc90 91.44,76.2 91.44,109.86 arc90 90.81,110.49 7.63,110.49 arc-45 7.18,110.68 5.9,111.95 arc45 5.45,112.14 3.56,112.14 arc90 2.92,111.51 2.92,110.74 arc90
15V  (via drill 0.6)
  Top 0.254: 119,22.86 C29.1
  Top 0.508: C10.1 arc90 C10.1 P3.5 | v119,18.54 119,22.86 | C29.1 C30.1 118.96,35.05 arc-90 119.47,35.56 U$22.20
  Top 0.762: v125.48,32.38 126.49,32.38 arc45 126.94,32.57 D2.A
  Top 1.016: v125.48,48.26 D3.A | D1.A 126.53,19.68 arc-45 125.81,19.98 v125.48,20.32
  pour Bottom (isolate 0.254, no thermals): 117.98,53.09 124.33,53.09 arc-90 124.97,52.45 124.97,33.4 arc90 125.48,32.89 arc-90 125.98,32.38 arc-90 125.48,31.88 arc90 124.97,31.37 124.97,18.54 arc-90 124.33,17.91 111.25,17.91 arc-90 109.98,19.18 109.98,29.84 arc-90 110.36,30.35 arc-90 110.87,29.84 110.87,19.81 arc90 111.51,19.18 120.78,19.18 arc90 121.41,19.81 121.41,50.93 arc90 120.78,51.56 117.98,51.56
  pour Bottom: 124.97,21.84 124.97,21.34 arc90 125.48,20.83 arc-90 125.98,20.32 arc-90 125.48,19.81 arc90 124.97,19.3 124.97,19.05 124.84,19.05 arc-90 124.71,19.18 124.71,21.84
  pour Bottom: 124.97,33.91 124.97,33.4 arc90 125.48,32.89 arc-90 125.98,32.38 arc-90 125.48,31.88 arc90 124.97,31.37 124.97,30.48 124.84,30.48 arc-90 124.71,30.61 124.71,33.91
  pour Bottom: 124.97,49.78 124.97,49.28 arc90 125.48,48.77 arc-90 125.98,48.26 arc-90 125.48,47.75 arc90 124.97,47.24 124.97,46.35 124.84,46.35 arc-90 124.71,46.48 124.71,49.78
15V1  (via drill 0.6)
  Top 0.254: 122.81,99.06 C72.1
  Top 0.508: C75.1 arc90 C75.1 P6.5 | v122.81,94.74 122.81,99.06 | C72.1 C73.1 122.77,111.25 arc-90 123.28,111.76 U$1.20
  Top 0.762: v129.29,108.58 130.3,108.58 arc45 130.75,108.77 D8.A
  Top 1.016: v129.29,124.46 D11.A | D6.A 130.34,95.89 arc-45 129.62,96.18 v129.29,96.52
  pour Bottom (isolate 0.254, no thermals): 121.79,129.29 128.14,129.29 arc-90 128.78,128.65 128.78,109.6 arc90 129.29,109.09 arc-90 129.79,108.58 arc-90 129.29,108.08 arc90 128.78,107.57 128.78,94.74 arc-90 128.14,94.11 115.06,94.11 arc-90 113.79,95.38 113.79,106.05 arc-90 114.17,106.55 arc-90 114.68,106.05 114.68,96.01 arc90 115.32,95.38 124.59,95.38 arc90 125.22,96.01 125.22,127.13 arc90 124.59,127.76 121.79,127.76